# Altium PCB MINI四轴.PcbDoc
Units mil, origin at the board's own origin, x right, y up, seen from the top; angles counter-clockwise.
Board outline 3779.5 x 3779.5 mil, 2 copper layers (Top Layer, Bottom Layer); 58 components, 50 nets, 216 pads, 56 vias.
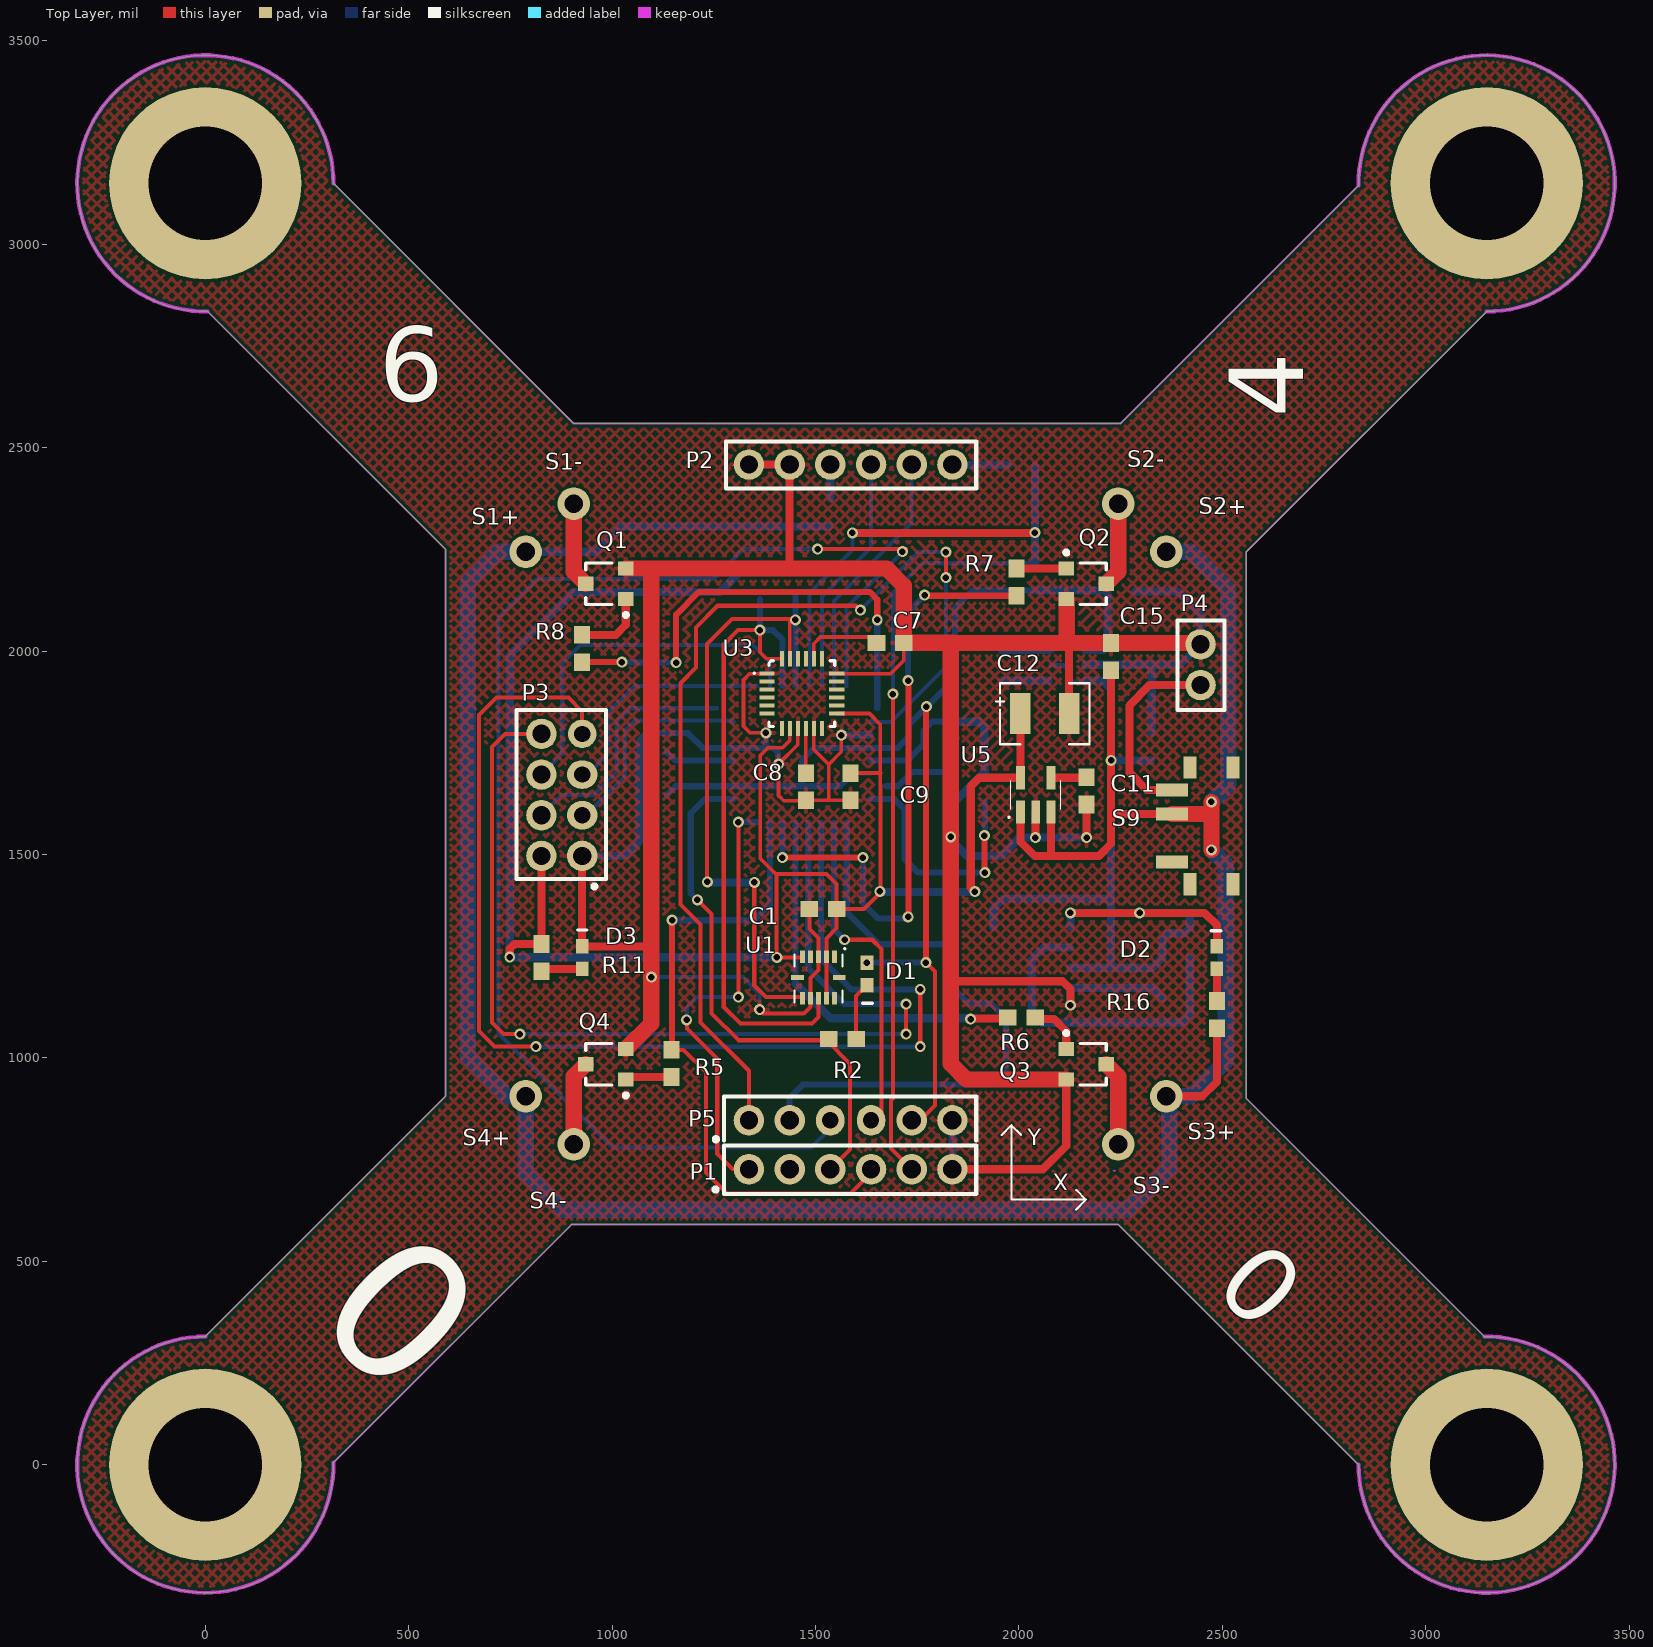
[diagram p0: Top Layer view]
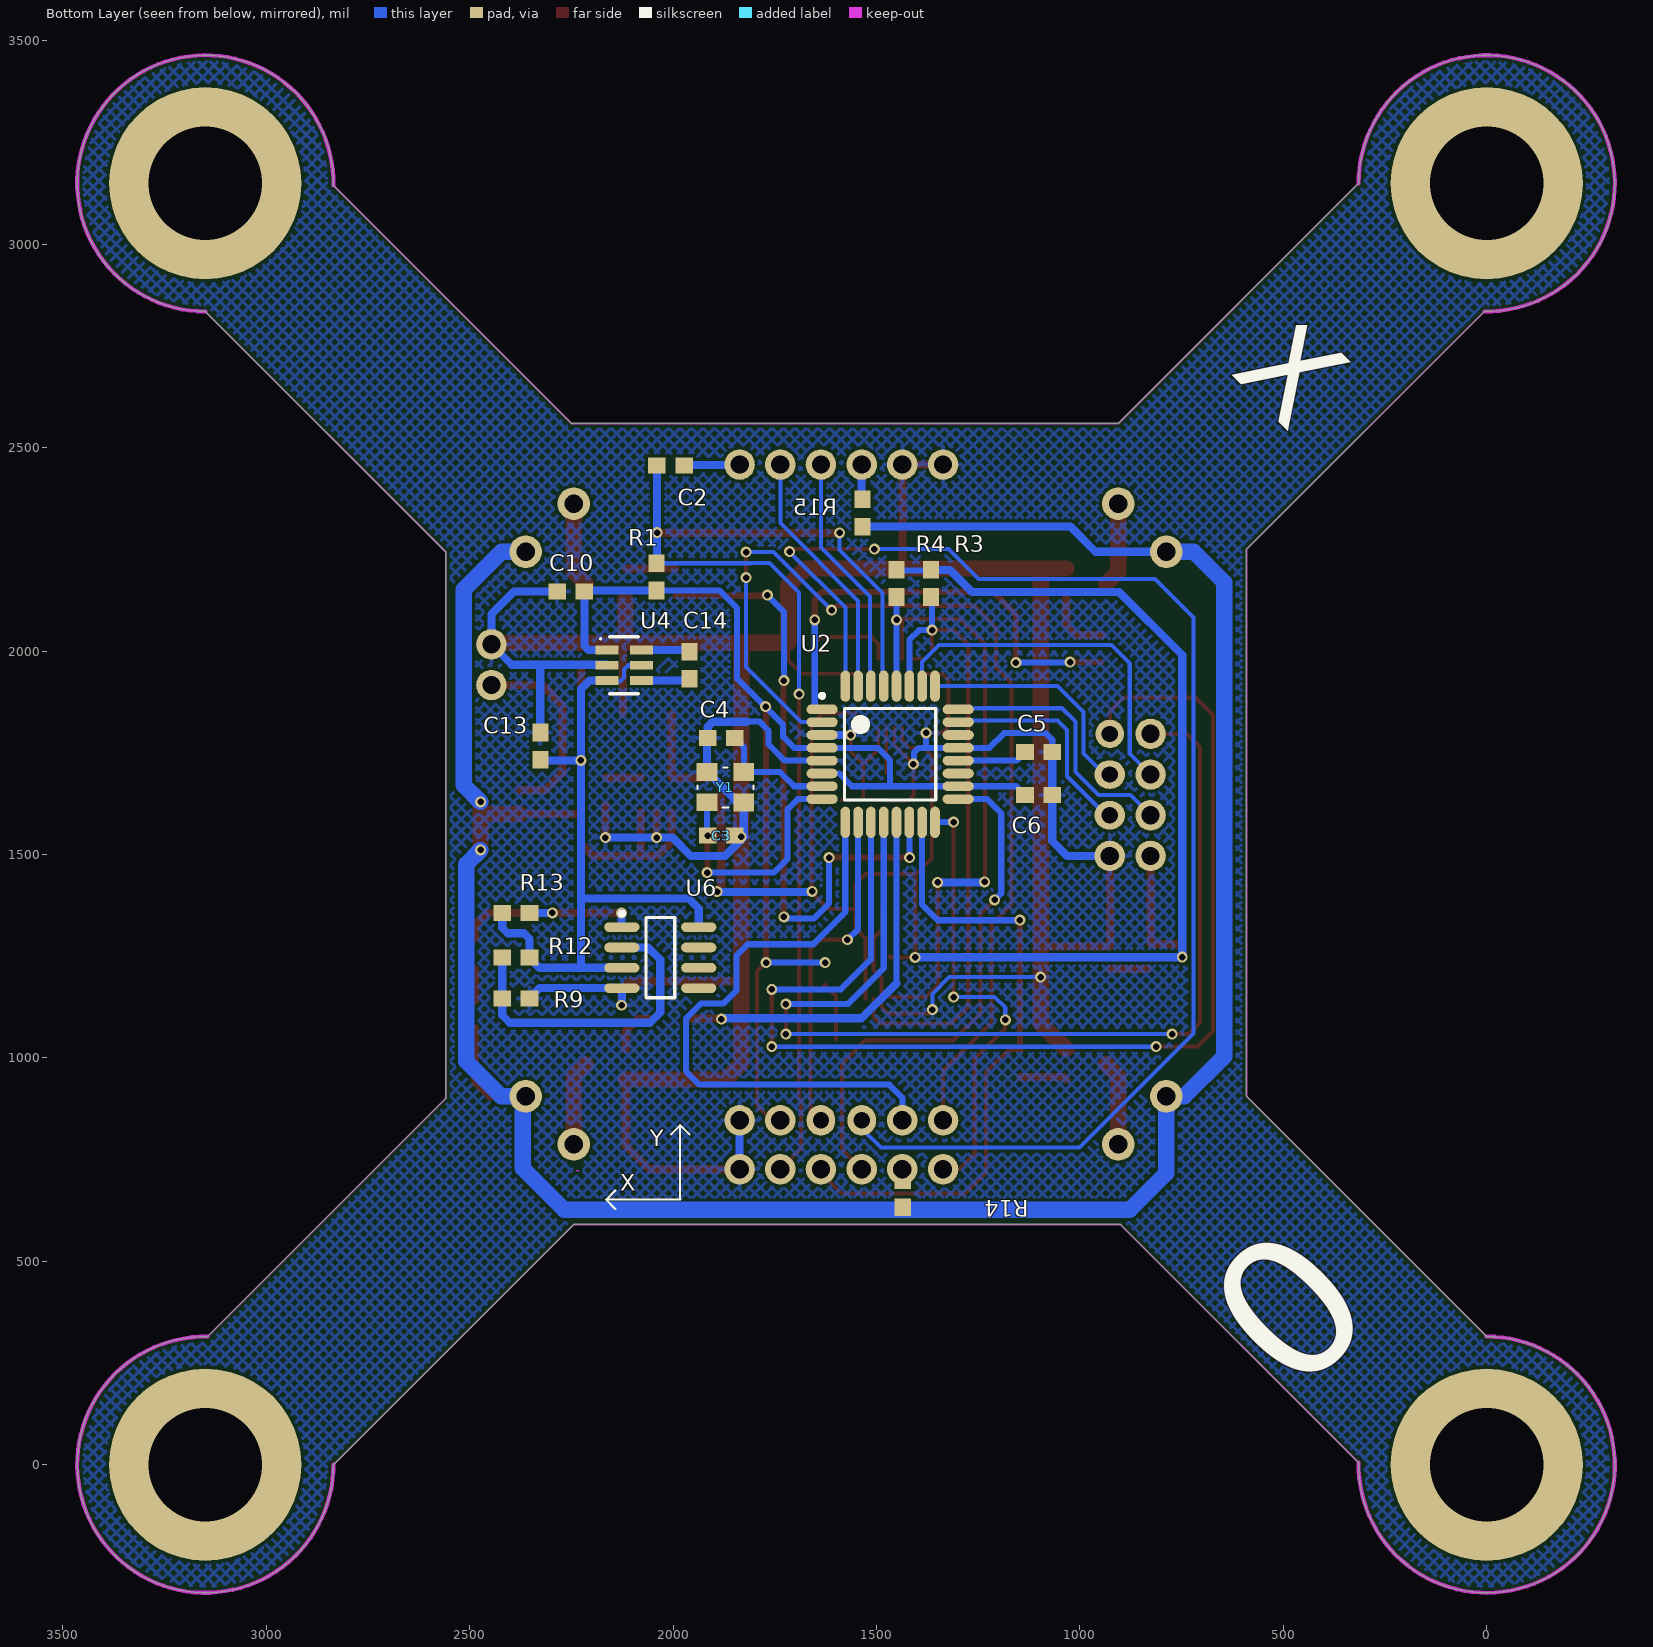
[diagram p1: Bottom Layer view, seen from below]

## Layer stack, top to bottom
Top Layer: signal copper 1.4
Dielectric: dielectric 12.6, FR-4, Dk 4.8
Bottom Layer: signal copper 1.4

## Board outline
0,314.96 ccw(c0,0) 314.91,5.62 899.84,590.55 2244.1,590.55 2834.65,0 ccw(c3149.61,0) 3143.98,314.91 2559.06,899.84 2559.06,2244.1 3149.61,2834.65 ccw(c3149.61,3149.61) 2834.7,3143.98 2249.77,2559.06 2250.5,2559.78 904.78,2559.78 314.96,3149.61 ccw(c0,3149.61) 5.62,2834.7 591.3,2249.02 590.55,2248.27 590.55,905.55

## Design rules (kind name [scope] priority, off if disabled: settings)
Clearance [All] p1: gap=7
HoleSize [All] p1: absolutevalues=TRUE maxlimit=1000 minlimit=12 maxpercent=80.000 minpercent=20.000
MinimumSolderMaskSliver [All] p1: minsoldermaskwidth=0
PolygonConnect [All] p1: connectstyle=Relief reliefconductorwidth=10 reliefentries=4 polygonreliefangle="90 Angle"
RoutingVias [All] p1: holewidth=40 width=50 viastyle="Through Hole" minholewidth=20 minwidth=30 maxholewidth=30 maxwidth=100
SilkscreenOverComponentPads [All] p1: minsilkscreentomaskgap=8
SolderMaskExpansion [All] p1: expansion=4
TestPointUsage [All] p1: valid=0 allowmultiple=FALSE
Testpoint [All] p1: side=15 testpointundercomponent=TRUE minsize=40 maxsize=100 preferedsize=60 minholesize=0 maxholesize=40 preferedholesize=32 testpointgrid=1 style=1023 order=0-112345678
Width [All] p1: maxlimit=50 minlimit=8 preferedwidth=30
21 further rules are at their usual default settings.

## Components (designator, comment, footprint, x,y, rotation, side; value= is the part's Value field where it differs from the comment)
C1 "0.1u" 1608[0603] 1518.3,1366.3 r180 top
C2 "0.1u" 1608[0603] 2006.3,2456.3 r180 bottom
C3 "15p" 1608[0603] 1881.3,1546.3 r180 bottom
C4 "15p" 1608[0603] 1881.3,1786.3 r180 bottom
C5 "0.1u" 1608[0603] 1101.3,1751.3 r0 bottom
C6 "0.1u" 1608[0603] 1101.3,1646.3 r0 bottom
C7 "2.2nf" 1608[0603] 1683.3,2020.3 r0 top
C8 "0.1u" 1608[0603] 1476.3,1666.3 r270 top
C9 "0.1u" 1608[0603] 1586.3,1666.3 r270 top
C10 "1u" 1608[0603] 2251.3,2146.3 r0 bottom
C11 "470p" 1608[0603] 2166.3,1656.3 r90 top
C12 "2.2u" TAN-B 2063.3,1846.3 r0 top
C13 "1u" 1608[0603] 2326.3,1766.3 r270 bottom
C14 "1u" 1608[0603] 1960,1965 r90 bottom
C15 "0.1u" 1608[0603] 2226.3,1986.3 r90 top
D1 "LED" L0603 1626.3,1206.3 r90 top
D2 "LED" L0603 2486.3,1246.3 r270 top
D3 "LED" L0603 926.3,1246.3 r270 top
P1 "ISP" PZ6#1 1586.3,726.3 r0 top
P2 "FTDI" PZ6#1 1586.3,2458.3 r180 top
P3 "24L01" PZ2_8 826.3,1646.3 r90 top
P4 "bat" Pz2 2446.3,1966.3 r90 top
P5 "Receive" PZ6#2 1586.3,846.3 r0 top
Q1 "IRLML2502" SO-G3/C2.5 984.25,2165.35 r90 top
Q2 "IRLML2502" SO-G3/C2.5 2165.35,2165.35 r270 top
Q3 "IRLML2502" SO-G3/C2.5 2165.35,984.25 r270 top
Q4 "IRLML2502" SO-G3/C2.5 984.25,984.25 r90 top
R1 "10k" 1608[0603] 2040.3,2182.3 r90 bottom
R2 "680" 1608[0603] 1566.3,1046.3 r180 top
R3 "2k" 1608[0603] 1366.3,2166.3 r270 bottom
R4 "2k" 1608[0603] 1450.3,2166.3 r270 bottom
R5 "20k" 1608[0603] 1146.3,986.3 r90 top
R6 "20k" 1608[0603] 2006.3,1099.3 r180 top
R7 "20k" 1608[0603] 1994.3,2169.3 r270 top
R8 "20k" 1608[0603] 926.3,2006.3 r270 top
R9 "10k" 1608[0603] 2386.3,1146.3 r180 bottom
R11 "680" 1608[0603] 826.3,1246.3 r270 top
R12 "5k" 1608[0603] 2386.3,1246.3 r0 bottom
R13 "1k" 1608[0603] 2386.3,1356.3 r0 bottom
R14 "0" 1608[0603] 1435.3,666.3 r90 bottom
R15 "0" 1608[0603] 1534.3,2339.3 r90 bottom
R16 "300" 1608[0603] 2486.3,1106.3 r270 top
S1+ "Temp" Temp#1 786.3,2086.3 r0 top
S1- "Temp" Temp#2 1186.3,2426.3 r0 top
S2+ "Temp" Temp#3 2646.3,2586.3 r0 top
S2- "Temp" Temp#4 2486.3,2286.3 r0 top
S3+ "Temp" Temp#5 2486.3,766.3 r0 top
S3- "Temp" Temp#6 2346.3,646.3 r0 top
S4+ "Temp" Temp#7 326.3,326.3 r0 top
S4- "Temp" Temp#8 446.3,426.3 r0 top
S9 "SW" SW_T 2526.3,1426.3 r90 top
U1 "BMA020" BMA020 1546.3,1146.3 r180 top
U2 "ATmega328" 32A_M 1466.3,1746.3 r180 bottom
U3 "ITG3205" itg3200fengzhuang 1466.3,1895.3 r0 top
U4 "LTC3200-5" SOT23-6 2120,1965 r270 bottom
U5 "MIC5219" SOT23-5 2046.3,1646.3 r0 top
U6 "LM393" 751-02_N 2031.3,1246.3 r180 bottom
Y1 "16M" Y-4 1806.3,1706.3 r0 bottom

## Footprints (in the part's own frame and the unit in brackets; to place one, negate y for a bottom-side part, rotate by r counter-clockwise, add the part's x,y. Pads: shape width x height; smd on the part's side, far side on the other; paste and mask are expansions set on the pad)
32A_M [mm] "Thin QFP, 32-Leads, Body 7x7mm, Pitch 0.8mm, IPC Low Density"
  oval 1.95x0.6 smd: 1(-4.25,2.8) 2(-4.25,2) 3(-4.25,1.2) 4(-4.25,0.4) 5(-4.25,-0.4) 6(-4.25,-1.2) 7(-4.25,-2) 8(-4.25,-2.8) 17(4.25,-2.8) 18(4.25,-2) 19(4.25,-1.2) 20(4.25,-0.4) 21(4.25,0.4) 22(4.25,1.2) 23(4.25,2) 24(4.25,2.8)
  oval 0.6x1.95 smd: 9(-2.8,-4.25) 10(-2,-4.25) 11(-1.2,-4.25) 12(-0.4,-4.25) 13(0.4,-4.25) 14(1.2,-4.25) 15(2,-4.25) 16(2.8,-4.25) 25(2.8,4.25) 26(2,4.25) 27(1.2,4.25) 28(0.4,4.25) 29(-0.4,4.25) 30(-1.2,4.25) 31(-2,4.25) 32(-2.8,4.25)
  silkscreen extent -4.38,-2.85 2.85,3.77, body extent -3.5,-3.5 3.5,3.5, height 1.2
751-02_N [mm] "SOIC, 8-Leads, Body 4.9x3.9mm, Pitch 1.27mm, IPC Medium Density"
  oval 2.2x0.6 smd: 1(-2.4,1.905) 2(-2.4,0.635) 3(-2.4,-0.635) 4(-2.4,-1.905) 5(2.4,-1.905) 6(2.4,-0.635) 7(2.4,0.635) 8(2.4,1.905)
  silkscreen extent -2.53,-2.5 0.9,2.88, body extent -1.95,-2.45 1.95,2.45, height 1.75
1608[0603] [mm] "Chip Capacitor; Body 1.6 x 0.8 mm (LxW typ)"
  rect 1.1x1 smd: 1(-0.85,0) 2(0.85,0)
BMA020 [mm]
  rect 0.32x0.8 smd: 1(0,-2.6) 2(0.5,-2.6) 3(1,-2.6) 4(1.5,-2.6) 5(2,-2.6) 6(2,0) 7(1.5,0) 8(1,0) 9(0.5,0) 10(0,0)
  rect 0.8x0.32 smd: 11(-0.3,-1.3) 12(2.3,-1.3)
  silkscreen extent -0.7,-3.15 2.5,0.25
itg3200fengzhuang [mm] "LCC, 24-Pins, Body 4.1x4.1mm (max), Pitch 0.50mm, IPC Medium Density"
  rect 0.95x0.25 smd: 1(-2.175,1.25) 2(-2.175,0.75) 3(-2.175,0.25) 4(-2.175,-0.25) 5(-2.175,-0.75) 6(-2.175,-1.25) 13(2.175,-1.25) 14(2.175,-0.75) 15(2.175,-0.25) 16(2.175,0.25) 17(2.175,0.75) 18(2.175,1.25)
  rect 0.25x0.95 smd: 7(-1.25,-2.175) 8(-0.75,-2.175) 9(-0.25,-2.175) 10(0.25,-2.175) 11(0.75,-2.175) 12(1.25,-2.175) 19(1.25,2.175) 20(0.75,2.175) 21(0.25,2.175) 22(-0.25,2.175) 23(-0.75,2.175) 24(-1.25,2.175)
  silkscreen extent -3.02,-2.05 2.05,2.05, body extent -2,-2 2,2, height 0.85
L0603 [mm] "Chip Inductor; Body 1.6 x 0.8 mm (LxW typ)"
  rect 0.9x0.8 smd: 1(-0.7,0) 2(0.7,0)
  silkscreen extent -1.83,-0.33 -1.83,0.27
Pz2 [mil]
  round 75 hole 45: 1(-50,0) 2(50,0)
  silkscreen extent -111,-59 109,56
PZ2_8 [mil]
  round 75 hole 45: 1(-150,-100) 2(-150,0) 4(-50,0) 6(50,0) 8(150,0)
  oval 70x75 hole 40: 3(-50,-100) 5(50,-100)
  round 70 hole 40: 7(150,-100)
  silkscreen extent -230,-159 209,61
PZ6#1 [mil]
  round 75 hole 45: 1(-250,0) 2(-150,0) 3(-50,0) 4(50,0) 5(150,0) 6(250,0)
  silkscreen extent -311,-61 309,59
PZ6#2 [mil]
  round 75 hole 45: 1(-250,0) 2(-150,0) 5(150,0) 6(250,0)
  oval 70x75 hole 40: 3(-50,0) 4(50,0)
  silkscreen extent -311,-50 309,59
SO-G3/C2.5 [mm] "SOT-23; 3 Leads; Body 3.0 x 2.6 mm, inc. leads (LxW max)"
  rect 0.9x0.95 smd: 1(-0.95,-1.25) 2(0.95,-1.25) 3(0,1.25)
  silkscreen extent -2.07,-1.38 1.3,1.25
SOT23-5 [mm]
  rect 0.55x1.45 smd: 1(-1.077,-1.075) 2(-0.127,-1.075) 3(0.823,-1.075) 4(0.823,1.075) 5(-1.077,1.075)
  silkscreen extent -1.85,-1.45 1.42,0.9
SOT23-6 [mm] "SOT-23/SC-74A; 5 Leads; Body 3.1 x 3 mm, inc. leads (LxW max)"
  rect 0.55x1.45 smd: 1(-0.95,-1.075) 2(0,-1.075) 3(0.95,-1.075) 4(0.95,1.075) 5(0,1.075) 6(-0.95,1.075)
  silkscreen extent -1.78,-1.52 1.78,0.9
SW_T [mm]
  rect 0.8x2 smd: 1(5.9,3.8) 2(4.4,3.8) 3(1.4,3.8)
  rect 1.4x0.8 smd: ""(0,2.7) ""(0,0) ""(7.3,0) ""(7.3,2.7)
TAN-B [mil]
  rect 50x100 smd: 1(-60,0) 2(60,0)
  silkscreen extent -120,-75 110,75
Temp#1 [mil]
  round 80 hole 45: 1(1.1,157.8)
Temp#2 [mil]
  round 80 hole 45: 1(-280.79,-64.09)
Temp#3 [mil]
  round 80 hole 45: 1(-284.09,-342.2)
Temp#4 [mil]
  round 80 hole 45: 1(-242.2,75.91)
Temp#5 [mil]
  round 80 hole 45: 1(-124.09,139.21)
Temp#6 [mil]
  round 80 hole 45: 1(-102.2,141.1)
Temp#7 [mil]
  round 80 hole 45: 1(461.1,579.21)
Temp#8 [mil]
  round 80 hole 45: 1(459.21,361.1)
Y-4 [mm]
  rect 1.3x1.1 smd: 1(0.5,0.094) 2(2.8,0.094) 3(2.8,1.992) 4(0.5,2)
  silkscreen extent -0.1,-0.2 3.4,2.3

## Part data
C1 C2 C3 C4 C5 C6 C7 C8 C9 C10 C11 C13 C14 C15: library part Cap, "Capacitor"
C12: library part CapT
D1 D2 D3: "Typical RED GaAs LED"
P1 P2 P5: library part P_6
P3: library part P2_8
P4: library part P_2
Q1 Q2 Q3 Q4: library part NPN
R1 R2 R3 R4 R5 R6 R7 R8 R9 R11 R12 R13 R14 R15 R16: library part Res
U2: library part ATmega328P
U3: library part IGT3205
U6: "Dual Comparator"
Y1: library part Y-4

## Free pads (board coordinates)
  round 472.44 hole 279.53: 1(3149.61,0) 2(3149.61,3149.61) 3(0,3149.61) 4(0,0)

## Via types
v1: diameter 27, hole 16, Top Layer to Bottom Layer, 56 vias

## Nets (pads, with @x,y where several pads share a name; then routed paths per layer and width w, separated by ;. In a path a pad name is that pad's centre, name@x,y a point inside that pad or via, vN(x,y) a via of type N, cw(c..) or ccw(c..) an arc to the next point about the centre after c; other vN are vias at no path point)
3.3V: C1.1 C9.1 C12.1 P3.2 R3.1 R4.1 R11.1 U1.2 U1.5 U1.9 U3.8 U3.13 U5.5 | length 5165.6
  Top Layer w9: U3.8 1436.77,1779.77 1419,1762 1383,1762 1364,1743 1364,1490 1402,1452 1527,1452 ; U3.13@1551.93,1846.3 1632.3,1846.3 1659.3,1819.3 1659.3,1699.76 1659.3,1671.3
  Top Layer w10: v1@1404,1247 1404,1451 ; v1(1405,1247) 1465.9,1247 U1.5 ; U1.9 U1.2 1526.62,1293.62 1551.76,1318.76 C1.1 ; 1527,1452 1551.76,1427.24 C1.1 ; C9.1 1659.3,1699.76 ; 1659.3,1671.3 1659.3,1406.3 1619.3,1366.3 C1.1
  Top Layer w20: v1(748.3,1247.3) 748.3,1268.3 759.76,1279.76 R11.1 P3.2 ; v1(1891.3,1408.3) 1881.3,1418.3 1881.3,1667.3 1902.62,1688.62 U5.5 2003.9,1845.7 C12.1
  Bottom Layer w15: R3.1@1367.3,2198.3 R4.1@1452.3,2198.3
  Bottom Layer w20: R3.1 1365.84,2199.3 1319.3,2199.3 1265.26,2145.26 903.26,2145.26 748.3,1990.3 v1(748.3,1247.3) v1@1405,1247.3 ; v1@1660.3,1407.3 1890.3,1407.3 v1(1891.3,1408.3)
  other v1: 1658.3,1409.3
5V: C6.2 C10.1 D1.2 P5.5 R1.1 U2.4 U2.6 U2.18 U4.1 | length 3031.7
  Top Layer w10: P5.5@1736.3,826.3 1793.3,883.3 1793.3,1212.3 v1(1771.3,1234.3)
  Top Layer w15: v1@1770.3,1233.3 v1(1771.3,1234.3) 1771.3,1862.3 v1(1772.3,1863.3)
  Bottom Layer w10: 1591.54,1699.06 U2.6
  Bottom Layer w15: C6.2 1156.02,1667.56 U2.18 1466.3,1667.56 ; 1591.54,1699.06 1560.04,1667.56 1466.3,1667.56 ; v1@1633.3,1234.3 v1(1771.3,1234.3) ; R1.1 1885.84,2148.84 1842.8,2105.8 1842.8,1932.8 1729.3,1819.3 1729.3,1789.3 1702.05,1762.05 U2.4 1497.05,1762.05 1466.3,1731.3 1466.3,1667.56
  Bottom Layer w20: R1.1 2215.3,2148.84 C10.1 2217.84,2012.84 2207.4,2002.4 U4.1
  other v1: 1626.3,1233.86
CE: P3.3 U2.23 | length 538.1
  Bottom Layer w10: P3.3 935.3,1596.3 1031.18,1692.18 1031.18,1806.18 1054.72,1829.72 1294.29,1829.72 U2.23
CSN: P3.4 U2.24 | length 612
  Bottom Layer w10: P3.4 876,1646 954,1646 1011.18,1703.18 1011.18,1826.18 1044.3,1859.3 1257.3,1859.3
D2: P5.3 U2.32 | length 3443.8
  Top Layer w10: v1(1505.3,2250.3) 1722.1,2250.3 1721.3,2251.1 1720.1,2251.1 v1(1713.3,2244.3)
  Bottom Layer w10: v1(1505.3,2250.3) 1322.3,2250.3 1249.3,2177.3 815.8,2177.3 720.8,2082.3 720.8,1059.8 1001.3,779.3 1489.3,779.3 P5.3@1536.3,826.3 ; U2.32 1576.54,2106.54 1713.3,2243.3 v1(1713.3,2244.3)
D3: R8.2 U2.1 | length 1121.8
  Top Layer w15: 946.3,1972.84 v1(1023.84,1972.84) ; v1(1157.3,1971.3) 1157.3,2089.3 1213.3,2145.3 1632.62,2145.3 1651.62,2126.3 v1(1651.62,2076.28)
  Bottom Layer w15: v1(1023.84,1972.84) 1025.37,1971.3 v1(1157.3,1971.3) ; U2.1@1651.62,1859.54 v1(1651.62,2076.28)
D4: P5.1 U2.2 | length 2550.5
  Top Layer w10: P5.1@1336.3,826.3 1336.3,968.3 1217.3,1087.3 1217.3,1327.24 1167.8,1376.74 1167.8,1920.8 1206.3,1959.3 1206.3,2058.3 1259.3,2111.3 1599.3,2111.3 v1@1608.8,2101.8 ; v1(1820.3,2180.3) v1(1820.3,2243.3)
  Bottom Layer w10: v1(1610.3,2100.3) 1753.3,2243.3 v1(1820.3,2243.3) ; U2.2@1640.31,1831.72 U2.2 1685.04,1825.04 1820.3,1960.3 v1(1820.3,2180.3)
D5: P5.2 U2.9 | length 1535.4
  Bottom Layer w15: P5.2@1436.3,826.3 1436.3,902.3 1468.3,934.3 1935.3,934.3 1968.3,967.3 1968.3,1096.3 1931.3,1133.3 1876.3,1133.3 1844.3,1165.3 1844.3,1251.3 1816.3,1279.3 1655.3,1279.3 1576.54,1358.06 U2.9
D6: P5.4 U2.10 | length 851.9
  Top Layer w10: v1(1571.3,1290.3) 1639.3,1290.3 1662.3,1267.3 1662.3,852.3 P5.4@1638.3,828.3
  Top Layer w20: P5.4@1636.3,826.3 P5.4@1638.3,828.3
  Bottom Layer w15: U2.10 1545.04,1316.56 v1(1571.3,1290.3)
D9: R6.2 U2.13 | length 926.7
  Top Layer w20: v1@1889.3,1096.3 R6.2@1962.84,1096.3
  Bottom Layer w15: 1450.55,1183.05 U2.13
  Bottom Layer w20: 1450.55,1183.05 1536.3,1097.3 v1@1872.3,1097.3
  other v1: 1881.3,1095.3
D10: R7.2 U2.14 | length 1553.8
  Top Layer w15: v1(1418.3,1492.3) v1(1616.3,1492.3) ; v1@1728.3,1346.3 v1@1728.3,1924.3 ; v1@1769.76,2135.84 R7.2
  Bottom Layer w15: v1@1419.06,1493.06 U2.14 ; v1(1616.3,1492.3) 1616.3,1380.3 1654.3,1342.3 1723.3,1342.3 v1(1727.3,1346.3) ; v1(1727.3,1927.3) 1727.3,2096.3 v1(1768.3,2137.3)
D11: P1.4 R5.2 U2.15 | length 1588.7
  Top Layer w10: R5.2 1175.84,1019.76 1230.3,965.3 1230.3,718.3 1282.3,666.3 1585.3,666.3 1636.3,717.3 P1.4
  Top Layer w15: R5.2 1147.3,1020.76 v1(1147.3,1338.3)
  Bottom Layer w15: v1(1147.3,1338.3) 1349.3,1338.3 1387.56,1376.56 U2.15
D12: P1.1 U2.16 | length 1089.1
  Top Layer w10: v1@1184.3,1085.3 1184.3,1072.3 1258.3,998.3 1258.3,764.3 1296.3,726.3 P1.1 ; v1(1310.3,1149.3) v1(1310.3,1579.3)
  Bottom Layer w10: v1(1183.3,1093.3) 1183.3,1123.3 1209.3,1149.3 v1(1310.3,1149.3)
  Bottom Layer w15: v1(1310.3,1579.3) 1355.74,1579.3 U2.16
D13: P1.3 R2.2 U2.17 | length 1304
  Top Layer w10: v1(1209.3,1388.3) 1244.3,1353.3 1244.3,1109.3 1310.3,1043.3 1526.3,1043.3 1585,984.6 1585,775 P1.3
  Bottom Layer w15: v1(1209.3,1388.3) 1193.3,1404.3 1193.3,1601.3 1228.06,1636.06 U2.17
DTR: C2.2 P2.1 | length 136.5
  Bottom Layer w20: P2.1@1836.3,2457.3 C2.2@1972.84,2457.3
GND: C1.2 C3.2 C4.1 C5.1 C6.1 C7.2 C8.2 C9.2 C10.2 C11.1 C12.2 C13.1 C15.2 D3.1 P1.6 P2.5 P2.6 P3.1 P4.2 P5.6 Q1.2 Q2.2 Q3.2 Q4.2 R9.2 U1.3 U1.7 U2.3 U2.5 U2.21 U3.1 U3.9 U3.11 U3.18 U4.2 U5.2 U6.4 Y1.2 Y1.4 | length 10995
  Top Layer w9: v1(1378,1799) 1339,1799 1323,1815 1323,1929 1338.51,1944.51 U3.1 ; U3.9 1456.46,1769.46 v1(1409,1722) 1409,1645 1422,1632 1475.46,1632 C8.2 1532.3,1632.84 ; U3.11 1495.83,1757.77 1532.3,1721.3 ; U3.18@1551.67,1944.25 U3.18 1684.51,1944.51 1716.76,1976.76 C7.2 ; v1(1563.3,1793.3) 1563.3,1752.3 1532.3,1721.3 ; C9.2 1532.3,1632.84 ; 1532.3,1632.84 1532.3,1721.3
  Top Layer w10: v1(1362.3,1118.3) 1371.3,1109.3 1470.99,1109.3 1487.24,1125.55 U1.7 1487.24,1196.24 1506.93,1215.93 U1.3 1506.93,1294.67 1484.84,1316.76 C1.2
  Top Layer w20: P3.1 D3.1 1094.43,1273.86 1095.98,1272.3 ; P2.6 P2.5 1436.3,2206.76 ; 1823.8,1188.3 2107.3,1188.3 2126.3,1169.3 v1(2126.3,1129.3) ; P1.6 2059.3,726.3 2116.14,783.14 Q3.2 ; v1(2040.3,1541.3) 2040.3,1602.98 U5.2 ; 2117.3,2019.76 2123.3,2013.76 C12.2 ; v1(2166.3,1541.3) C11.1
  Top Layer w40: Q4.2 1095.98,1084.17 1095.98,1272.3 1095.98,2202.07 1095.3,2202.76 ; Q1.2 1095.3,2202.76 ; 1840.3,2020.3 C7.2 1716.76,2160.84 1674.84,2202.76 1095.3,2202.76 ; Q3.2 1870.75,946.85 1832.3,985.3 1832.3,1179.8 1832.3,1533.8 1832.3,2019.76 2117.3,2019.76 ; Q2.2@2117.3,2125.8 2117.3,2019.76 ; P4.2 2442.84,2019.76 C15.2 2117.3,2019.76
  Bottom Layer w10: v1(1096.3,1198.3) 1321.3,1198.3 1362.3,1157.3 v1(1362.3,1118.3)
  Bottom Layer w15: C5.1 1067.84,1781.84 1084.3,1798.3 1186.3,1798.3 1222.55,1762.05 U2.21 1378,1762.05 ; v1(1378,1799) 1378,1762.05 ; v1(1409,1722) 1408,1723 1408,1750 1395.95,1762.05 1378,1762.05 ; U2.5 1725.55,1730.55 1765.3,1770.3 1765.3,1804.3 1787.3,1826.3 1818.21,1826.3 ; C3.2@1843.84,1550.3 C3.2
  Bottom Layer w20: P3.1 1031.3,1496.3 1067.84,1532.84 C6.1 C5.1 ; v1(1563.3,1793.3) 1563.54,1793.54 U2.3 ; 1818.21,1826.3 1901.3,1826.3 1914.76,1812.84 C4.1 ; P1.6 P5.6@1836.3,826.3 ; Y1.2@1915.73,1702.6 1840.69,1627.56 Y1.4 1825.99,1542.61 1872.3,1496.3 1956.3,1496.3 2001.3,1541.3 v1(2040.3,1541.3) v1(2166.3,1541.3) ; Y1.2 C4.1@1916.54,1784.53 ; v1(2126.3,1129.3) 2125.79,1129.81 U6.4 2327.84,1171.3 R9.2 ; U4.2 2163.62,1966.3 2326.3,1966.3 ; C10.2 2391.3,2146.3 2446.3,2091.3 P4.2 2396.3,1966.3 2326.3,1966.3 ; C13.1 2326.3,1966.3
  other v1: 1832.3,1543.3
IRQ: P3.8 U2.12 | length 2551.5
  Top Layer w10: v1(773.3,1058.3) 733.3,1058.3 704.3,1087.3 704.3,1764.3 736.3,1796.3 P3.8 ; v1(1722.3,1058.3) v1(1722.3,1132.3)
  Bottom Layer w10: v1(773.3,1058.3) v1(1722.3,1058.3)
  Bottom Layer w15: U2.12 1482.05,1220.55 1570.3,1132.3 v1(1722.3,1132.3)
M1: Q1.3 S1-.1 | length 209.1
  Top Layer w40: S1-.1 905.51,2194.88 Q1.3
M2: Q2.3 S2-.1 | length 209.1
  Top Layer w40: Q2.3 2244.1,2194.88 S2-.1
M3: Q3.3 S3-.1 | length 209.1
  Top Layer w40: Q3.3 2244.1,954.72 S3-.1
M4: Q4.3 S4-.1 | length 209.1
  Top Layer w40: S4-.1 905.51,954.72 Q4.3
MISO: P3.7 U2.11 | length 2969.9
  Top Layer w10: v1@812.3,1028.3 710.3,1028.3 672.3,1066.3 672.3,1842.3 715.3,1885.3 892.3,1885.3 926.3,1851.3 P3.7 ; v1(1757.3,1027.3) v1(1757.3,1168.3)
  Bottom Layer w10: v1(812.3,1027.3) v1(1757.3,1027.3)
  Bottom Layer w15: U2.11 1513.54,1242.06 1587.3,1168.3 v1(1757.3,1168.3)
MOSI: P3.6 U2.26 | length 899.5
  Bottom Layer w10: P3.6 877.3,1747.3 877.3,1969.3 922.3,2014.3 1346.3,2014.3 1387.56,1973.04 U2.26
NetC5_2: C5.2 U2.20 | length 172.8
  Bottom Layer w15: C5.2 1155.51,1730.55 U2.20
NetC7_1: C7.1 U3.20 | length 203.5
  Top Layer w9: U3.20 1495.83,2017.83 1512.3,2034.3 1635.84,2034.3 C7.1
NetC8_1: C8.1 U3.10 | length 109.9
  Top Layer w9: C8.1@1476.14,1699.76 U3.10
NetC11_2: C11.2 U5.4 | length 86.5
  Top Layer w20: U5.4 C11.2@2165.16,1688.62
NetC14_1: C14.1 U4.4 | length 119.3
  Bottom Layer w10: U4.4@2073.74,1926.54 U4.4@2077.68,1922.6
  Bottom Layer w20: C14.1@1958.94,1927.4 U4.4@2072.68,1927.4
NetC14_2: C14.2 U4.6 | length 119.3
  Bottom Layer w20: C14.2 1963.94,2002.4 U4.6
NetD1_1: D1.1 R2.1 | length 156.2
  Top Layer w10: R2.1 1599.76,1152.21 D1.1 D1.1@1635.3,1169.74
NetD2_1: D2.1 R13.1 U6.1 | length 495.9
  Top Layer w20: v1(2126.3,1356.3) v1(2296.3,1356.3) 2456.3,1356.3 2486.3,1326.3 2486.3,1293.86
  Bottom Layer w20: U6.1@2126.3,1321.81 v1(2126.3,1356.3) ; v1(2296.3,1356.3) R13.1
NetD2_2: D2.2 R16.1 | length 79
  Top Layer w20: R16.1 D2.2
NetD3_2: D3.2 R11.2 | length 94.1
  Top Layer w20: R11.2@832.2,1218.74 D3.2
NetP1_2: P1.2 R14.2
NetP2_4: P2.4 R15.2 | length 83.5
  Bottom Layer w20: R15.2@1536.3,2374.76 P2.4
NetP4_1: P4.1 S9.1 | length 493.8
  Top Layer w20: S9.1 2314.02,1658.58 2271.3,1701.3 2271.3,1866.3 2321.3,1916.3 P4.1
  Top Layer w30: P4.1@2436.3,1916.3 P4.1
NetQ1_1: Q1.1 R8.1 | length 160.9
  Top Layer w20: 946.3,2039.76 1008.76,2039.76 1033.47,2064.47 Q1.1
NetQ2_1: Q2.1 R7.1 | length 121.8
  Top Layer w20: R7.1 Q2.1
NetQ3_1: Q3.1 R6.1 | length 124.7
  Top Layer w20: R6.1@2048.76,1095.3 2086.3,1095.3 2116.14,1065.46 ; 2115.3,1066.3 2116.14,1065.46 ; Q3.1 2116.14,1065.46
NetQ4_1: Q4.1 R5.1 | length 115.3
  Top Layer w20: Q4.1 1039.45,952.84 R5.1
NetR9_1: R9.1 R12.2 U6.2 | length 784.9
  Bottom Layer w20: U6.2 2061.3,1271.3 2031.3,1241.3 2031.3,1111.3 2056.3,1086.3 2401.3,1086.3 2419.76,1104.76 R9.1 R12.2
RESET: C2.1 P1.5 R1.2 U2.29 | length 2930.5
  Top Layer w10: v1@1689.3,1893.3 1690,1892.6 1690,900 1685.8,895.8 1685.8,776.8 P1.5
  Top Layer w20: v1(1590.3,2290.3) v1@2039.3,2290.3
  Bottom Layer w9: U2.29 U2.29@1484.48,1916.06
  Bottom Layer w10: U2.29@1484.48,1916.06 1484.98,1916.56 1484.98,2142.98 1590.3,2248.3 v1(1590.3,2290.3) ; v1(1690.3,1894.3) 1690.3,2143.3 1763.3,2216.3 1808.41,2216.3 1808.91,2215.8 2039.26,2215.8 R1.2@2039.76,2216.3
  Bottom Layer w20: v1(2039.3,2291.3) 2039.3,2216.76 2039.76,2216.3 R1.2 ; v1@2039.76,2291.3 C2.1
RX: P2.3 U2.30 | length 592.4
  Bottom Layer w10: U2.30@1515.73,1915.81 1515.73,2133.73 1636.3,2254.3 P2.3
SCK: P3.5 U2.25 | length 579.8
  Bottom Layer w10: P3.5 939.3,1696.3 991.18,1748.18 991.18,1850.18 1055.3,1914.3 U2.25@1356.06,1914.3
SCL: R4.2 U1.6 U2.28 U3.23 | length 1646.4
  Top Layer w9: U3.23 1436.77,2078.33
  Top Layer w10: v1@1233.3,1432.3 1233.3,2017.3 1294.8,2078.8 1436.3,2078.8 v1@1450.55,2078.8 ; v1(1349.3,1431.3) 1349.3,1178.3 1378.3,1149.3 U1.6@1464.56,1149.3
  Bottom Layer w15: U2.28 v1(1450.55,2076.3) ; v1@1450.55,2083.3 v1(1450.55,2076.3) ; R4.2@1450.55,2132.58 v1(1450.55,2076.3)
  Bottom Layer w20: v1@1234.3,1431.3 v1(1349.3,1431.3)
  other v1: 1234.3,1432.3
SDA: R3.2 U1.8 U2.27 U3.24 | length 1667.6
  Top Layer w9: v1(1363.3,2051.3) 1363.3,1997.3 1379.67,1980.93 U3.24
  Top Layer w10: v1(1363.3,2051.3) 1309.3,2051.3 1274.3,2016.3 1274.3,1125.3 1315.3,1084.3 1491.3,1084.3 1506.93,1099.93 U1.8
  Bottom Layer w15: R3.2@1363.3,2127.84 v1(1363.3,2051.3) 1395.3,2051.3 1419.06,2027.54 U2.27
TX: P2.2 U2.31 | length 623.9
  Bottom Layer w10: U2.31 1545.04,2123.04 1736.3,2314.3 P2.2
VCC: C13.2 C15.1 R12.1 R13.2 R14.1 R15.1 R16.2 S1+.1 S2+.1 S3+.1 S4+.1 S9.2 U4.3 U4.5 U5.1 U5.3 U6.3 U6.8 | length 8966.6
  Top Layer w20: U5.1 2003.9,1531.1 2038.7,1496.3 2079.3,1496.3 ; U5.3 2078.7,1496.9 2079.3,1496.3 ; C15.1 v1(2226.3,1731.3) 2226.3,1599.53 ; S3+.1 2450.51,905.51 2486.3,941.3 R16.2 ; S9.2 2226.3,1599.53 ; 2079.3,1496.3 2196.3,1496.3 2226.3,1526.3 2226.3,1599.53
  Top Layer w40: S9.2 2473.15,1599.53 ; v1(2473.15,1510.95) 2473.15,1599.53 ; v1(2473.15,1629.06) 2473.15,1599.53
  Bottom Layer w10: U4.5 2110,1965 2120,1955 2120,1935 2130,1925 2159.72,1925 U4.3
  Bottom Layer w20: S1+.1 961.1,2244.1 1022.84,2305.84 R15.1 ; U6.8 1936.81,1366.81 1961.3,1391.3 2226.3,1391.3 ; U6.3 2226.3,1221.3 ; U4.3 2205,1927.6 2226.3,1906.3 v1(2226.3,1731.3) ; C13.2@2324.76,1731.3 v1(2226.3,1731.3) ; R13.2@2419.76,1346.3 2419.76,1319.76 2406.3,1306.3 2366.3,1306.3 2352.84,1292.84 R12.1 2327.84,1221.3 2226.3,1221.3 ; 2226.3,1221.3 2226.3,1391.3 ; 2226.3,1391.3 v1(2226.3,1731.3)
  Bottom Layer w40: S1+.1 720.1,2244.1 645.3,2169.3 645.3,1003.3 743.09,905.51 S4+.1 787.4,716.2 877.3,626.3 2267.3,626.3 2369.3,728.3 2369.3,898.42 S3+.1 2422.51,905.51 2508.3,991.3 2508.3,1475.8 v1(2473.15,1510.95) ; S2+.1 2421.5,2244.1 2514.3,2151.3 2514.3,1670.21 v1(2473.15,1629.06)
XTAL1: C4.2 U2.7 Y1.1 | length 259.6
  Bottom Layer w15: 1673.69,1667.56 1702.56,1667.56 1737.6,1702.6 Y1.1 1825.99,1764.45 C4.2
XTAL2: C3.1 U2.8 Y1.3 | length 598.3
  Top Layer w15: v1@1914.76,1456.84 v1(1914.76,1546.3)
  Bottom Layer w15: U2.8 1693.54,1636.06 1718.3,1611.3 1718.3,1489.3 1752.3,1455.3 v1(1916.3,1455.3) ; C3.1@1916.54,1548.07 Y1.3
pads on no net: S9. S9.3 U1.1 U1.4 U1.10 U1.11 U1.12 U2.19 U2.22 U3.2 U3.3 U3.4 U3.5 U3.6 U3.7 U3.12 U3.14 U3.15 U3.16 U3.17 U3.19 U3.21 U3.22 U6.5 U6.6 U6.7

## Polygon pours and split planes (outlines as drawn)
GND on Top Layer "Top Overlay-No Net" (hatched 45Degree grid 20 track 8, remove dead copper): -460,3635 3850,3635 3865,3620 3810,3565 3810,-505 -400,-505 -450,-455 -455,-450 -455,3630
GND on Bottom Layer "Top Overlay-No Net" (hatched 45Degree grid 20 track 8, remove dead copper): -615,3775 -595,3755 3845,3755 3845,-290 3720,-415 3640,-495 -615,-495 -615,3755 -600,3770

## Keep-outs
Keep-Out Layer:
  lines w4: 0,314.96 590,904.96 590,2251 6.3,2834.7 5.62,2834.7 ; 314.91,5.62 315.62,5.62 900,590 2244.65,590 2834.65,0 ; 314.96,3149.61 905.57,2559 2249,2559 2833.98,3143.98 2834.7,3143.98 ; 2232.3,722.3 2236.3,722.3 ; 3143.98,314.91 3143.98,315.02 2559,900 2559,2244.04 3149.61,2834.65
  lines w10: 0,314.96 ccw(c0,0) 314.91,5.62 ; 5.62,2834.7 cw(c0,3149.61) 314.96,3149.61 ; 2834.65,0 ccw(c3149.61,0) 3143.98,314.91 ; 2834.7,3143.98 cw(c3149.61,3149.61) 3149.61,2834.65

## Silkscreen, mask and mechanical layers (free items; w line width, h text height)
Top Overlay:
  circle w10: c1254.2,676.3 r5.1
  circle w10: c1254.9,800 r5.1
  lines w5: 1957.3,810.3 1981.3,834.3 ; 2005.3,810.3 1981.3,834.3 ; 2140.3,627.3 2164.3,651.3 ; 2140.3,675.3 2164.3,651.3 ; 1981.3,834.3 1981.3,651.3 2164.3,651.3
  text "4" at 2759.3,2573.3 h314.96 r90
  text "6" at 426.3,2553.3 h314.96
  text "Y" at 2055.3,785.3 h40
  text "X" at 2122.3,715.3 h40 r180
  text "0" at 2759.3,492.3 h314.96 r135
  text "0" at 174.3,282.3 h590.55 r315
Bottom Overlay:
  lines w5: 1959.3,811.3 1982.3,834.3 ; 1981.3,651.3 2164.3,651.3 ; 1982.3,651.3 1982.3,834.3 ; 2005.3,811.3 1982.3,834.3 ; 2141.3,628.3 2164.3,651.3 ; 2141.3,674.3 2164.3,651.3
  text "X" at 534.3,2480.3 h393.7 r45
  text "Y" at 2023.3,782.3 h40
  text "X" at 2091.3,673.3 h40
  text "0" at 179.3,291.3 h590.55 r315
Mechanical 1:
  lines w5: -0.02,314.98 590.55,905.55 590.55,2248.27 ; 5.62,2834.7 591.3,2249.02 ; 314.91,5.62 899.84,590.55 2244.1,590.55 2834.65,0 ; 314.96,3149.61 904.78,2559.78 2250.5,2559.78 ; 2249.77,2559.06 2834.7,3143.98 ; 3143.98,314.91 2559.06,899.84 2559.06,2244.1 3149.61,2834.65
  lines w10: 0,314.96 ccw(c0,0) 314.91,5.62 ; 5.62,2834.7 cw(c0,3149.61) 314.96,3149.61 ; 2834.65,0 ccw(c3149.61,0) 3143.98,314.91 ; 2834.7,3143.98 cw(c3149.61,3149.61) 3149.61,2834.65